# Altium PCB PCB1.PcbDoc
Units mm, origin at the board's own origin, x right, y up, seen from the top; angles counter-clockwise.
Board outline 28.96 x 45.59 mm, 2 copper layers (Top Layer, Bottom Layer); 11 components, 12 nets, 37 pads, 4 vias.
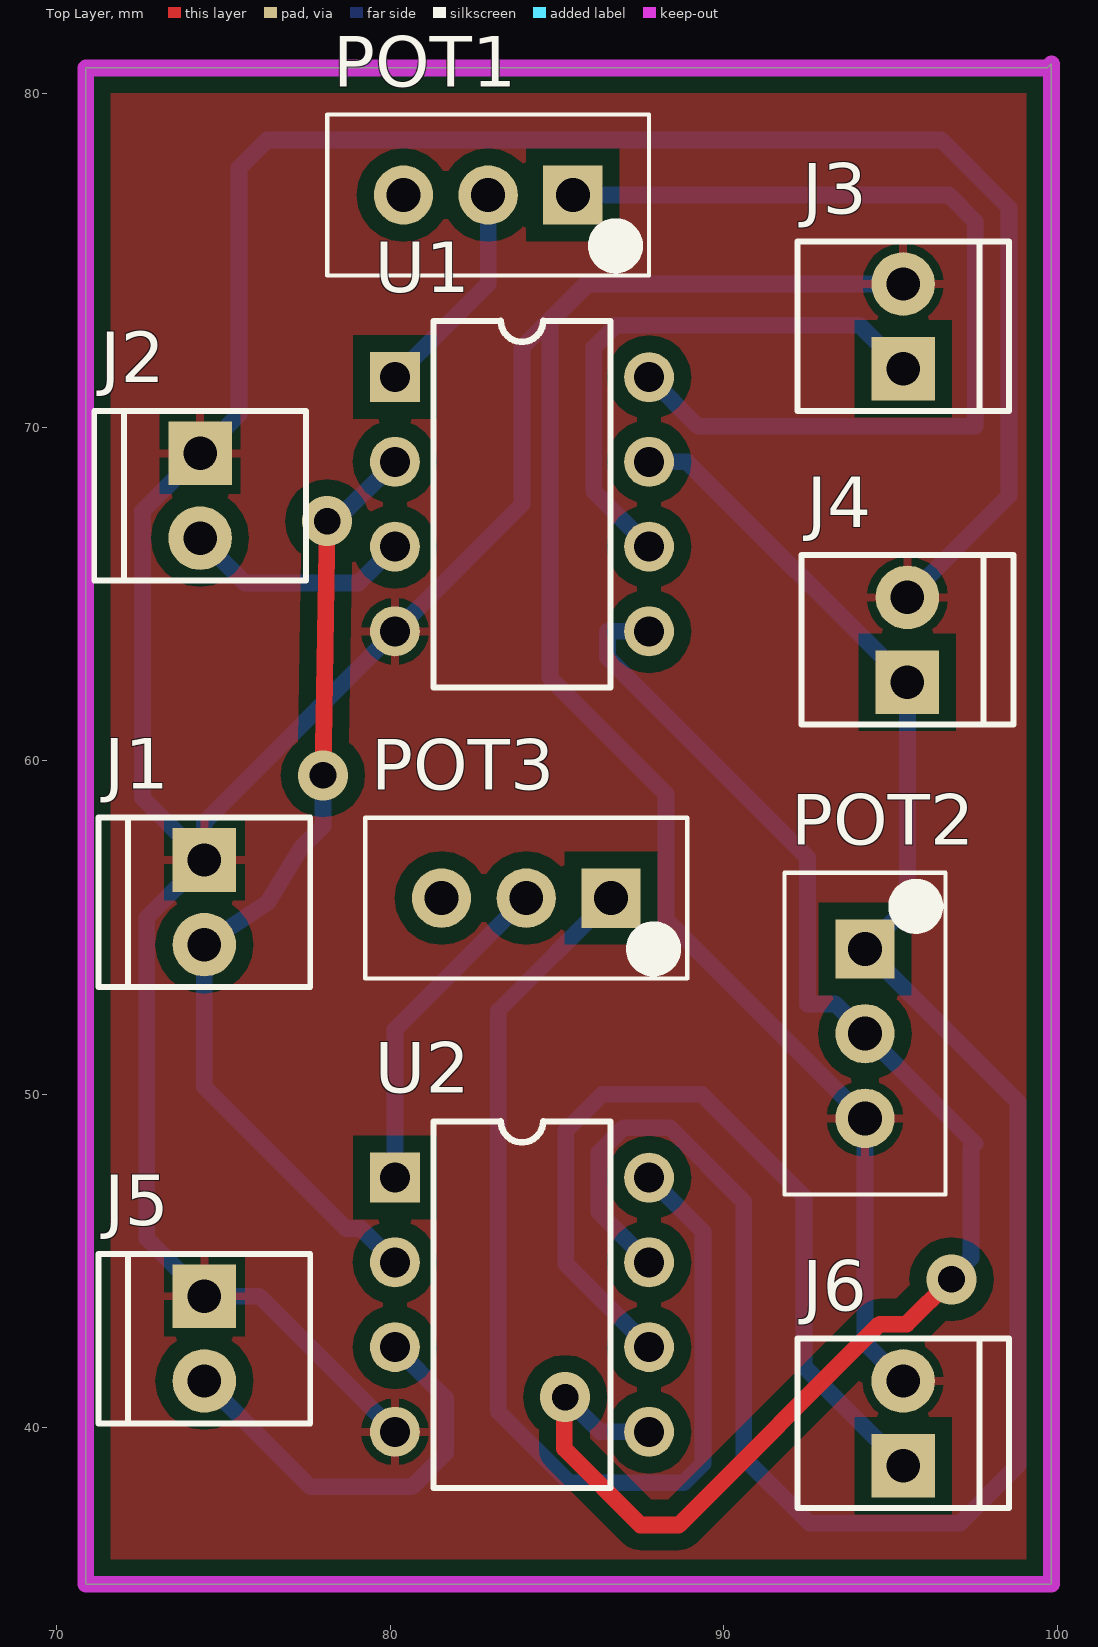
[diagram p0: Top Layer view]
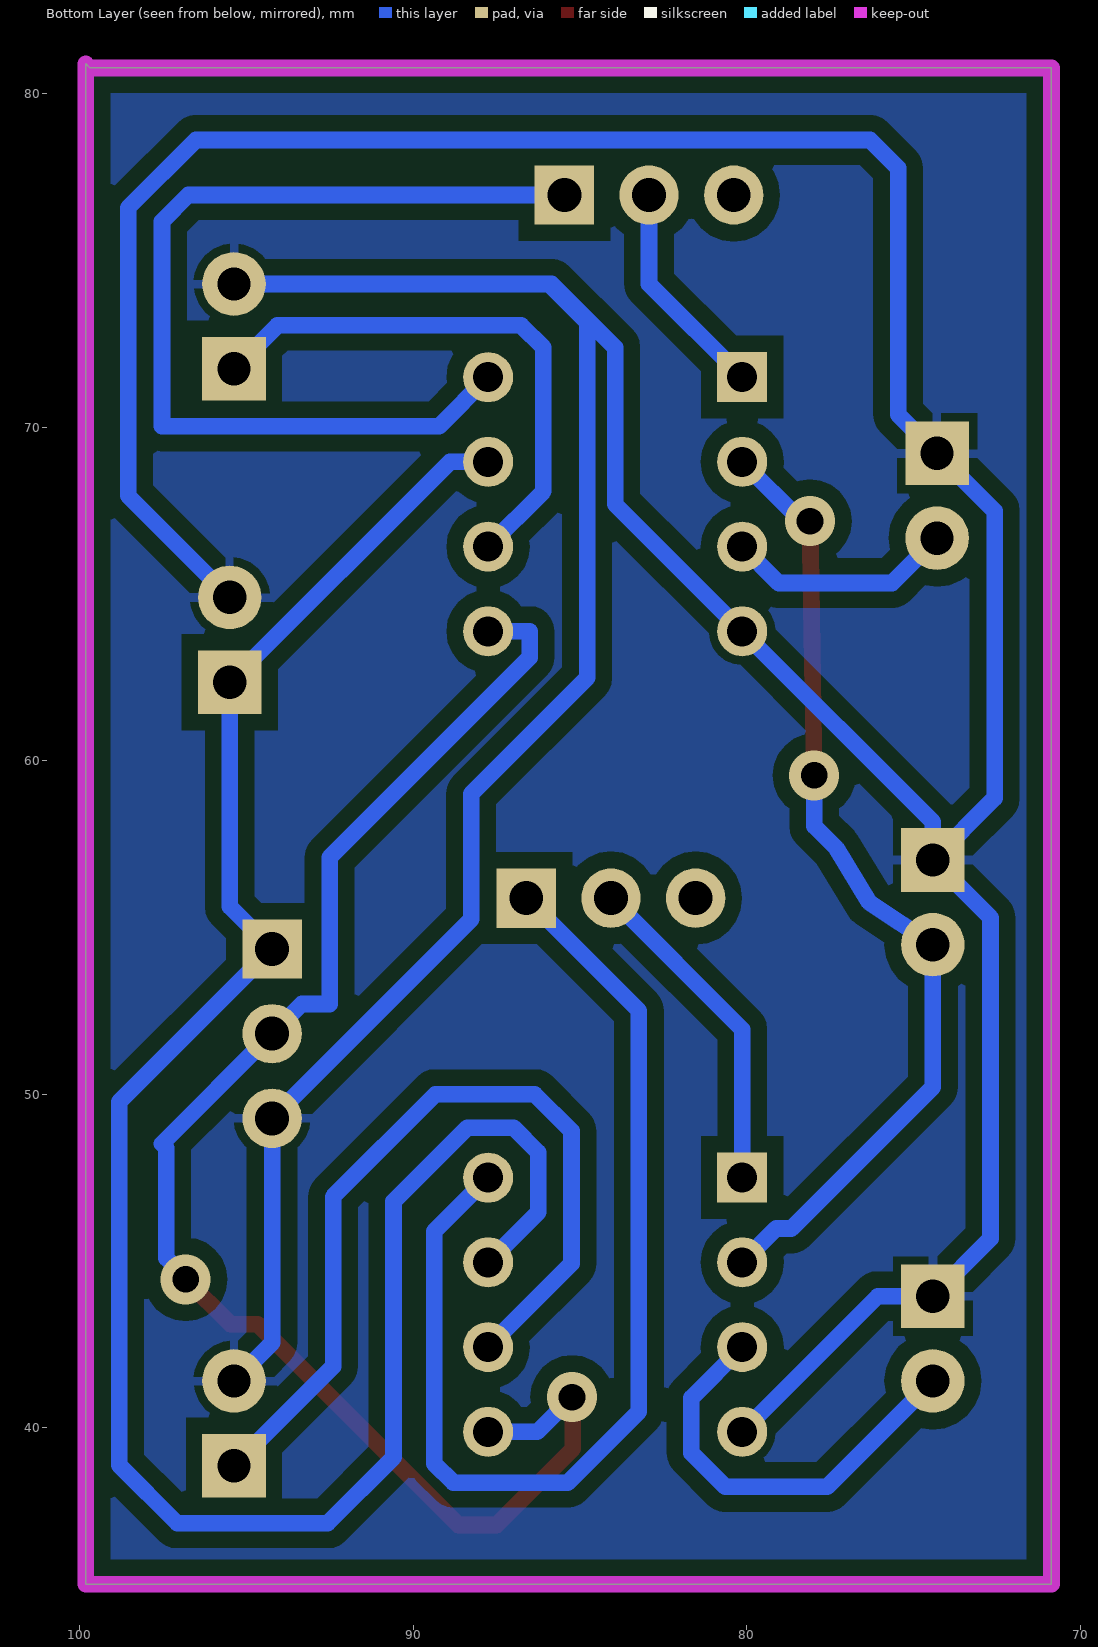
[diagram p1: Bottom Layer view, seen from below]

## Layer stack, top to bottom
Top Solder: solder mask 0.0102, Solder Resist, Dk 3.5
Top Layer: signal copper 0.0356
Dielectric 1: dielectric 0.32, FR-4, Dk 4.8
Bottom Layer: signal copper 0.0356
Bottom Solder: solder mask 0.0102, Solder Resist, Dk 3.5

## Board outline
70.866,35.306 99.822,35.306 99.822,80.899 99.695,80.772 70.866,80.772

## Design rules (kind name [scope] priority, off if disabled: settings)
Clearance [All] p1: gap=0.5
PolygonConnect [All] p1: connectstyle=Relief reliefconductorwidth=0.254 reliefentries=4 polygonreliefangle="90 Angle" airgapwidth=0.254
RoomDefinition Ampli [InComponentClass('Ampli')] p1 off: confinementstyle=ConfineIn formatcopy=TRUE lockcomponents=FALSE outline 117.094,11.811 117.094,104.267 104.394,104.267 104.394,11.811
RoutingVias [All] p1: holewidth=0.711 width=1.27 viastyle="Through Hole" minholewidth=0.711 minwidth=1.27 maxholewidth=0.711 maxwidth=1.27
SolderMaskExpansion [All] p1: expansion=0.102
Width [All] p1: maxlimit=1.5 minlimit=0.5 preferedwidth=0.5
30 further rules are at their usual default settings.

## Components (designator, comment, footprint, x,y, rotation, side; value= is the part's Value field where it differs from the comment)
J1 "Input" MTA100-2 74.422,57.023 r180 top
J2 "Input" MTA100-2 74.295,69.215 r180 top
J3 "Input" MTA100-2 95.377,71.755 r0 top
J4 "Input" MTA100-2 95.504,62.357 r0 top
J5 "Input" MTA100-2 74.422,43.942 r180 top
J6 "Input" MTA100-2 95.377,38.862 r0 top
POT1 "?????" VR1 82.931,76.962 r180 top
POT2 "?????" VR1 94.234,51.816 r270 top
POT3 "?????" VR1 84.074,55.88 r180 top
U1 "OpAmp Single" DIP8 83.947,67.691 r270 top
U2 "OpAmp Single" DIP8 83.947,43.688 r270 top

## Footprints (in the part's own frame and the unit in brackets; to place one, negate y for a bottom-side part, rotate by r counter-clockwise, add the part's x,y. Pads: shape width x height; smd on the part's side, far side on the other; paste and mask are expansions set on the pad)
DIP8 [mm] "DIP8"
  rect 1.5x1.5 hole 0.9: 1(-3.81,-3.81)
  round 1.5 hole 0.9: 2(-1.27,-3.81) 3(1.27,-3.81) 4(3.81,-3.81) 5(3.81,3.81) 6(1.27,3.81) 7(-1.27,3.81) 8(-3.81,3.81)
  silkscreen extent -5.5,-2.65 5.5,2.65, body extent -5.59,-4.19 5.59,4.19, height 2.54
MTA100-2 [mm] "MTA100-2 M"
  rect 1.905x1.905 hole 1.001: 1(0,0)
  round 1.905 hole 1.001: 2(0,2.54)
  silkscreen extent -3.18,-1.27 3.17,3.81, body extent -3.18,-1.27 3.17,3.81, height 2.54
VR1 [mil] "Trim 10T Vertical"
  rect 70x70 hole 40: 1(-100,0)
  round 70 hole 40: 2(0,0) 3(100,0)
  silkscreen extent -190,-95 190,95, body extent -190,-95 190,95, height 478

## Part data
J1 J2 J3 J4 J5 J6: library part MTA100-2, "MTA Male 0 Degres"
POT1 POT2 POT3: library part "Res Pot 10T Vertical"

## Via types
v1: diameter 1.5, hole 0.8, Top Layer to Bottom Layer, 4 vias

## Nets (pads, with @x,y where several pads share a name; then routed paths per layer and width w, separated by ;. In a path a pad name is that pad's centre, name@x,y a point inside that pad or via, vN(x,y) a via of type N, cw(c..) or ccw(c..) an arc to the next point about the centre after c; other vN are vias at no path point)
GND: J1.1 J2.1 J3.2 J4.2 J5.1 J6.2 POT2.3 U1.4 U2.4 | length 151.1
  Bottom Layer w0.5: U2.4 76.073,43.942 J5.1 72.695,45.669 72.695,55.296 J1.1 ; J6.2 94.234,42.545 POT2.3 88.265,55.245 88.265,59.007 84.785,62.487 84.785,73.152 85.928,74.295 ; J3.2 85.928,74.295 ; J4.2 98.552,67.945 98.552,76.581 96.52,78.613 76.302,78.613 75.463,77.775 75.463,70.383 J2.1 72.568,67.488 72.568,58.877 J1.1 ; J1.1 74.422,58.166 U1.4 83.947,67.691 83.947,72.39 85.852,74.295 85.928,74.295
LEDREF: J1.2 U1.2 U2.2 | length 29.2
  Top Layer w0.5: v1(77.978,59.563) v1(78.105,67.183)
  Bottom Layer w0.5: v1(77.978,59.563) 77.978,58.039 77.318,57.379 76.327,55.753 J1.2 74.422,50.216 78.664,45.974 79.121,45.974 U2.2 ; v1(78.105,67.183) 78.359,67.183 U1.2
NetJ2_2: J2.2 U1.3 | length 6.9
  Bottom Layer w0.5: J2.2 75.641,65.329 79.045,65.329 U1.3
NetJ3_1: J3.1 U1.6 | length 16.7
  Bottom Layer w0.5: U1.6 86.103,68.075 86.103,72.39 86.768,73.055 94.077,73.055 J3.1
NetJ5_2: J5.2 U2.3 | length 12.8
  Bottom Layer w0.5: J5.2 77.597,38.227 80.645,38.227 81.661,39.243 81.661,40.894 U2.3
NetJ6_1: J6.1 U2.6 | length 25.7
  Bottom Layer w0.5: U2.6 85.257,44.918 85.257,48.895 86.36,49.998 89.335,49.998 92.405,46.927 92.405,41.834 J6.1
NetPOT1_1: POT1.1 U1.8 | length 28.9
  Bottom Layer w0.5: POT1.1 96.749,76.962 97.536,76.175 97.536,70.028 89.23,70.028 U1.8
NetPOT1_2: POT1.2 U1.1 | length 6.6
  Bottom Layer w0.5: U1.1 82.931,74.295 POT1.2
NetPOT3_1: POT3.1 U2.8 | length 33.3
  Bottom Layer w0.5: POT3.1 83.236,52.502 83.236,40.483 85.365,38.354 88.798,38.354 89.374,38.929 89.374,45.881 U2.8
NetPOT3_2: POT3.2 U2.1 | length 10
  Bottom Layer w0.5: U2.1 80.137,51.943 POT3.2
REF: POT2.2 U1.5 U2.5 | length 46.1
  Top Layer w0.5: v1(85.241,40.918) 85.217,40.894 85.217,39.37 87.503,37.084 88.651,37.084 94.672,43.104 95.479,43.104 v1(96.825,44.45)
  Bottom Layer w0.5: v1(85.241,40.918) 86.281,39.878 U2.5 ; U1.5 86.512,63.881 86.512,63.094 92.507,57.099 92.507,52.705 93.345,52.705 POT2.2 97.536,48.514 97.409,48.387 97.409,45.085 96.825,44.501 v1(96.825,44.45)
VCC: J4.1 POT2.1 U1.7 U2.7 | length 63.3
  Bottom Layer w0.5: U2.7 86.257,46.458 86.257,48.26 86.995,48.998 88.378,48.998 90.595,46.781 90.595,39.11 92.57,37.135 97.079,37.135 98.822,38.878 98.822,49.768 POT2.1 95.504,55.626 J4.1 88.9,68.961 U1.7
pads on no net: POT1.3 POT3.3

## Polygon pours and split planes (outlines as drawn)
GND on Top Layer "Top Layer-No Net" (solid, pour order 2): 70.866,80.772 70.866,35.306 99.822,35.306 99.822,35.941 99.822,80.772
GND on Bottom Layer "Top Layer-No Net" (solid, pour order 4): 70.866,80.772 70.866,35.306 71.12,35.56 99.822,35.56 99.822,80.772

## Keep-outs
Keep-Out Layer:
  the board outline again, w0.5

## Silkscreen, mask and mechanical layers (free items; w line width, h text height)
Mechanical 1:
  text "CLKOUT" at 90.043,76.454 h1.52
  text "CLKIN" at 71.755,71.501 h1.52
  text "ALIM" at 92.837,66.675 h1.52
  text "VREF" at 92.329,57.531 h1.52
  text "LEDREF" at 72.009,51.181 h1.52
  text "MANIN" at 71.882,37.973 h1.52
  text "MANOUT" at 91.44,36.322 h1.3